# Altium PCB driver_l4_2023-07-21.pcbdoc (part 2 of 2)
Units mil, origin at the board's own origin, x right, y up, seen from the top; angles counter-clockwise.
Board outline 2980 x 3085.67 mil, 2 copper layers (Top Layer, Bottom Layer); 71 components, 86 nets, 273 pads, 209 vias.
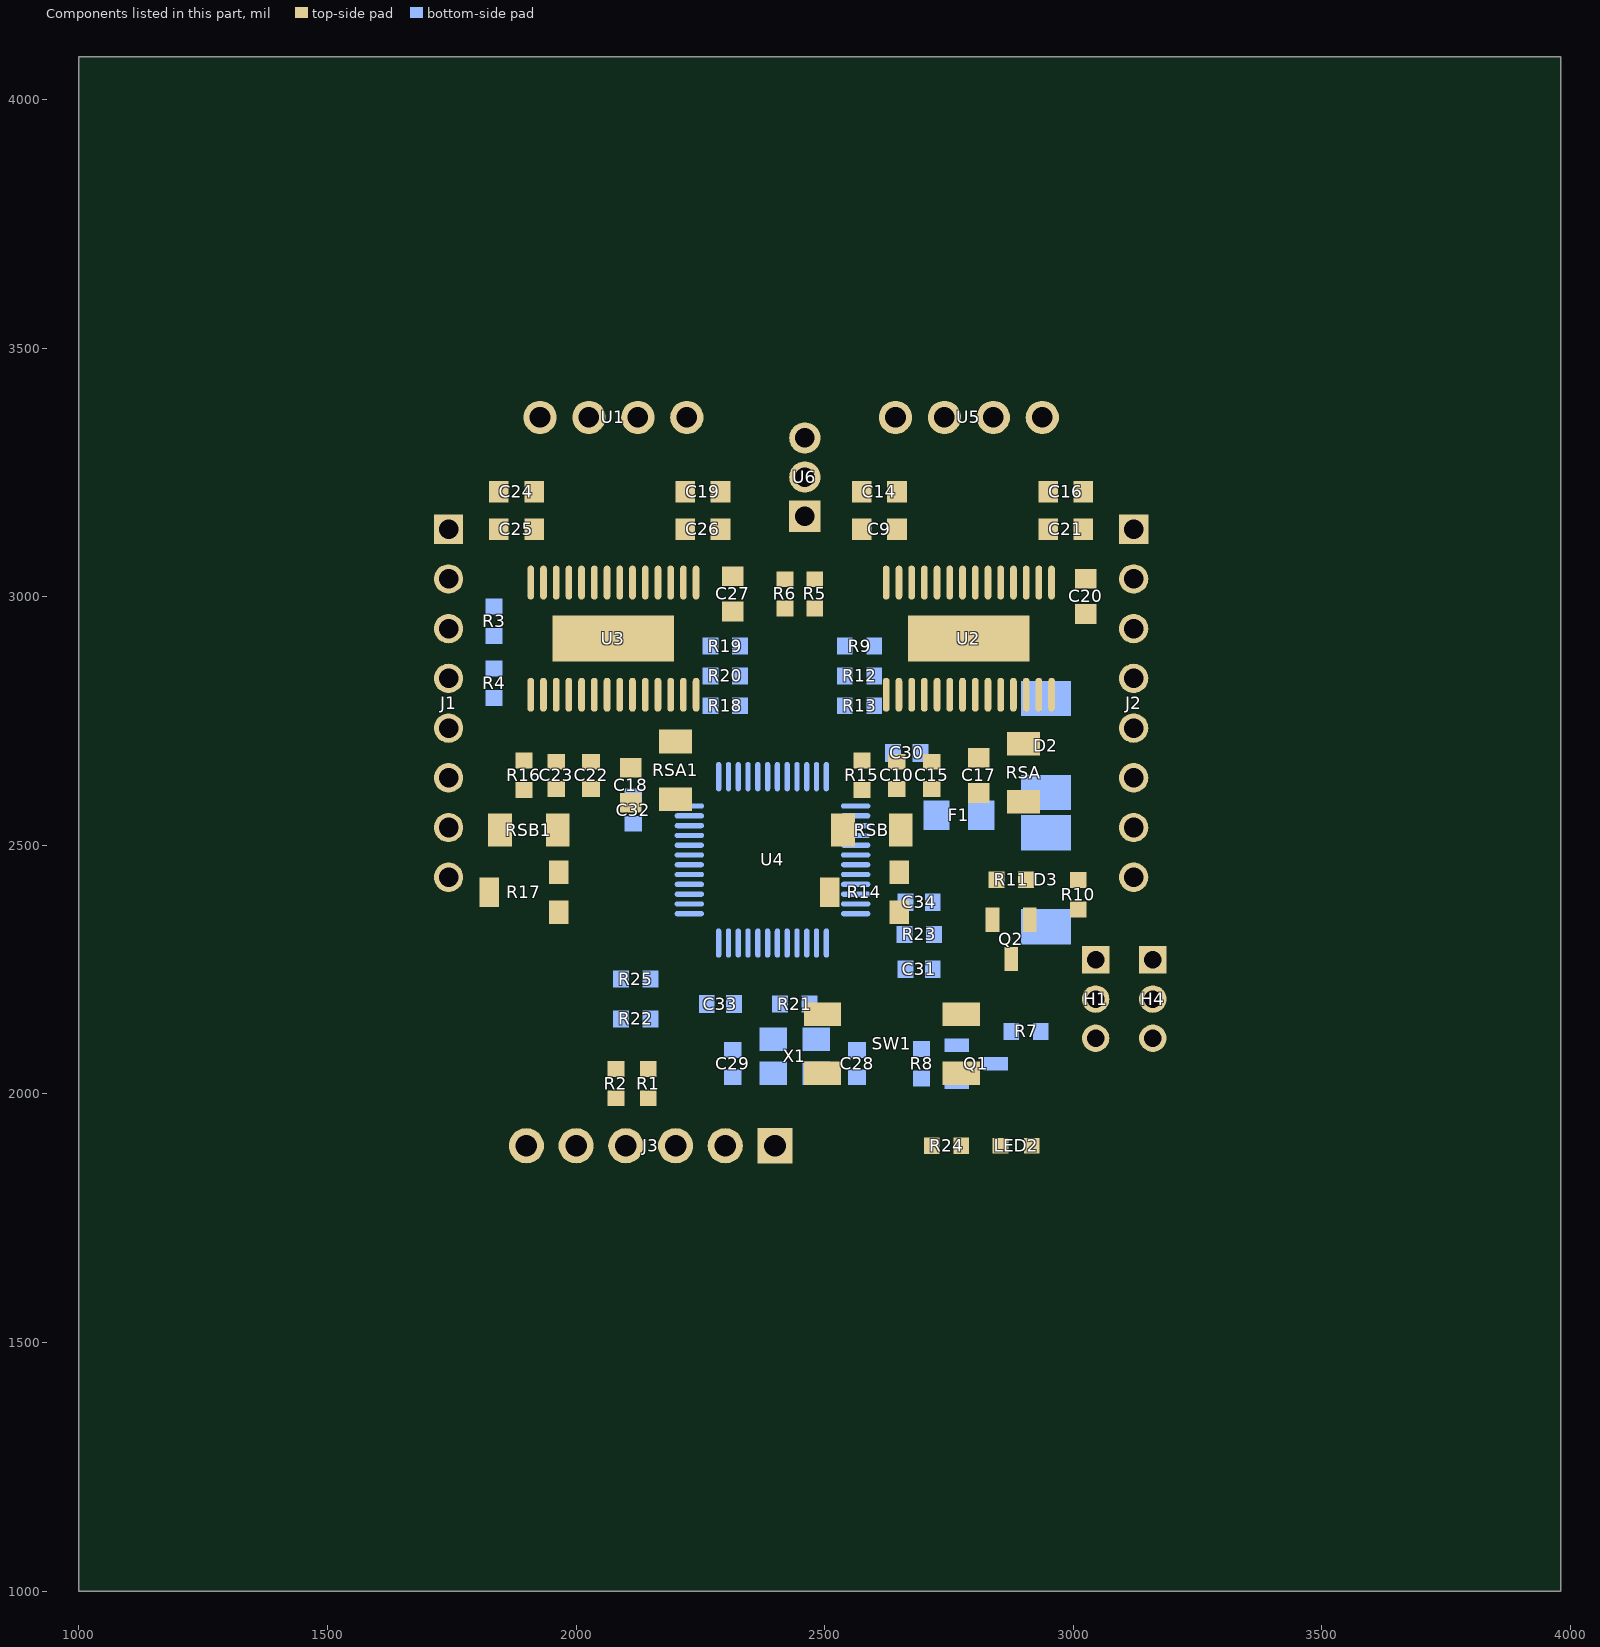
[diagram p2: the components of this part, seen from the top]

## Other copper (continued)
Bottom Layer:
  region net STEP1: 2586.53,2396.46 2586.53,2407.09 2596.1,2406.77 2596.1,2396.77
  region net STEP2: 2538.11,2426.78 2538.11,2416.14 2523.11,2416.47 2523.11,2426.47
  region net PWM_SERVO2: 2586.53,2455.52 2586.53,2466.15 2601.53,2465.83 2601.53,2455.83
  region net PWM_SERVO: 2586.55,2485.82 2586.52,2475.19 2601.52,2475.47 2601.55,2485.47
  region net STDBY1: 2538.11,2514.56 2538.11,2525.19 2523.11,2524.88 2523.11,2514.88
  region net CHRG1: 2538.11,2534.25 2538.11,2544.88 2523.11,2544.57 2523.11,2534.57
  region net R3_CTRL: 2469.22,2662.2 2458.59,2662.2 2458.9,2677.2 2468.9,2677.2
  region net R2_CTRL: 2449.52,2662.2 2438.89,2662.2 2439.21,2677.2 2449.21,2677.2
  region net R1_CTRL: 2429.85,2662.22 2419.22,2662.18 2419.5,2671.15 2429.5,2671.19
  region net RX_DLD: 2410.15,2613.83 2399.52,2613.72 2400,2598.72 2410,2598.83
  region net TX_DLD: 2390.48,2613.78 2379.85,2613.78 2380.16,2598.78 2390.16,2598.78
  region net DIR1: 2351.11,2662.2 2340.48,2662.2 2340.79,2677.2 2350.79,2677.2
  region net DIR2: 2331.42,2662.2 2320.79,2662.2 2321.1,2677.2 2331.1,2677.2
  region net EN1: 2311.74,2613.77 2301.11,2613.78 2301.4,2599.28 2311.4,2599.26
  region net EN2: 2292.05,2662.23 2281.42,2662.18 2281.7,2668.95 2291.7,2668.99
  region net BOOT1: 2251.91,2505.51 2251.87,2494.88 2260.48,2495.17 2260.52,2505.17
  region net CHRG_SAMPLE: 2203.47,2416.14 2203.47,2426.78 2188.47,2426.46 2188.47,2416.46
  region net BAT_SAMPLE: 2203.47,2396.46 2203.47,2407.09 2188.47,2406.77 2188.47,2396.77
  region net RX_LINUX: 2251.89,2357.09 2251.89,2367.72 2266.89,2367.4 2266.89,2357.4
  region net TX_LINUX: 2292.05,2327.56 2281.42,2327.56 2281.73,2342.4 2291.73,2342.4
  region net NRST: 2390.48,2279.08 2379.85,2279.19 2380,2264.19 2390,2264.08
  region net U4_6: 2410.15,2279.14 2399.52,2279.14 2399.84,2264.14 2409.84,2264.14
  region net U4_5: 2429.85,2279.12 2419.22,2279.15 2419.5,2266.18 2429.5,2266.16
  region net BAT_SAMPLE: 1731.46,3106.22 1713.9,3124.01 1708.59,3108.03 1715.62,3100.92
  region net H1_1: 3017.44,2256.87 3017.44,2281.87 3002.44,2274.37 3002.44,2264.37
  region net R20_1: 2254.47,2825.13 2254.47,2855.15 2245,2839.16 2249.25,2826.42
  region net GND: 2345.53,2823.66 2345.53,2857.68 2355,2850.67 2355,2830.67
  region net R19_1: 2254.47,2885.66 2254.47,2915.68 2236.46,2906.67 2236.46,2894.66
  region net GND: 2345.53,2883.66 2345.53,2917.68 2355,2910.67 2355,2890.67
  region net R18_1: 2254.47,2765.66 2254.47,2795.68 2236.46,2786.67 2236.46,2774.66
  region net GND: 2345.53,2763.66 2345.53,2797.68 2355,2790.67 2355,2770.67
  region net U2_17: 2615.53,2795.68 2615.53,2765.66 2622.18,2774.66 2622.18,2786.67
  region net GND: 2524.47,2797.68 2524.47,2763.66 2515,2770.67 2515,2790.67
  region net U2_19: 2615.53,2857.68 2615.53,2830.66 2633.54,2839.66 2633.54,2851.67
  region net GND: 2524.47,2857.68 2524.47,2823.66 2515,2830.67 2515,2850.67
  region net U2_24: 2615.53,2915.68 2615.53,2885.66 2633.54,2894.66 2633.54,2906.67
  region net GND: 2524.47,2917.68 2524.47,2883.66 2515,2890.67 2515,2910.67
  region net GND: 2074.47,2213.66 2074.47,2247.68 2055,2240.67 2055,2220.67
  region net BOOT1: 2165.53,2218.17 2165.53,2243.17 2180.53,2235.67 2180.53,2225.67
  region net VCC3.3: 1852.01,2780.14 1817.99,2780.14 1850.86,2750.67 1872.07,2757.74
  region net CHRG1: 1817.99,2871.2 1817.99,2839.45 1797.74,2848.58 1797.74,2862.08
  region net CHRG1: 1852.01,2843.04 1852.01,2868.04 1864.95,2860.67 1865,2850.67
  region net VCC3.3: 1817.99,2996.2 1852.01,2996.2 1857.07,3003.6 1835.86,3010.67
  region net STDBY1: 1817.99,2936.89 1817.99,2905.14 1797.74,2914.26 1797.74,2927.76
  region net STDBY1: 1852.01,2908.17 1852.01,2933.17 1867.01,2925.67 1867.01,2915.67
  region net GND: 2698.74,2579.41 2698.74,2553.59 2695,2564.81 2698.74,2579.41
  region net GND: 2702.07,2543.6 2698.74,2531.14 2698.74,2553.59 2702.07,2543.6
  region net GND: 2750.02,2590.2 2700.02,2590.2 2715.02,2590.69 2735.02,2590.69
  region net GND: 2729.14,2525.67 2712.73,2531.14 2698.74,2531.14 2707.93,2532.74 2712.73,2531.14 2745.47,2531.14 2729.14,2525.67
  region net GND: 2510.86,2086.5 2510.86,2133.75 2524.84,2123.17 2525,2098.17
  region net GND: 2509.55,2093.09 2510.86,2133.75 2515.44,2109.37 2509.55,2093.09
  region net GND: 2509.34,2086.5 2507.93,2088.6 2509.55,2093.09 2509.34,2086.5
  region net U4_6: 2409.19,2133.75 2384.19,2133.75 2391.69,2137.36 2401.69,2137.36
  region net U4_6: 2369.13,2122.67 2369.13,2097.67 2354.13,2105.17 2354.13,2115.17
  region net GND: 2369.13,2064.85 2369.13,2017.6 2365.55,2028.72 2365.55,2053.72
  region net U4_5: 2455.75,2064.85 2455.75,2042.42 2440.75,2062.85 2440.75,2076.99
  region net U4_5: 2510.86,2020.61 2510.86,2045.61 2525.86,2038.11 2525.86,2028.11
  region net NRST: 2732.16,2303.66 2707.16,2303.66 2714.66,2288.66 2724.66,2288.66
  region net VCC3.3: 2676.22,2337.68 2644.47,2337.68 2647.84,2375.18 2672.84,2375.18
  region net VCC3.3: 2676.22,2303.66 2676.22,2337.68 2680,2330.67 2680,2310.67
  region net VCC3.3: 2644.47,2337.68 2644.47,2303.66 2640,2310.67 2640,2330.67
  region net GND: 2074.47,2133.66 2074.47,2167.68 2055,2160.67 2055,2140.67
  region net BOOT0: 2165.53,2138.17 2165.53,2163.17 2180.53,2155.67 2180.53,2145.67
  region net U4_5: 2457.2,2197.68 2482.2,2197.68 2474.7,2212.68 2464.7,2212.68
  region net U4_5: 2472.5,2163.66 2453.78,2163.66 2455,2160.67 2465,2160.67
  region net U4_6: 2422.84,2197.68 2397.84,2197.68 2405.34,2212.68 2415.34,2212.68
  region net U4_6: 2394.47,2163.66 2417.5,2163.66 2410,2148.66 2400,2148.66
  region net VCC3.3: 2712.01,2046.89 2712.01,2015.14 2719.83,2018.17 2720,2043.17
  region net VCC3.3: 2712.01,2015.14 2677.99,2028.14 2676.16,2019.51 2697.79,2005.78
  region net PWM_SERVO2: 2707.5,2106.2 2682.5,2106.2 2690,2110.67 2700,2110.67
  region net PWM_SERVO2: 2712.01,2085.57 2712.01,2106.2 2727.01,2103.07 2727.01,2093.07
  region net PWM_SERVO2: 2712.01,2106.2 2677.99,2106.2 2685,2110.67 2705,2110.67
  region net VCC5: 2945.35,2142.68 2950.53,2108.66 2956.87,2123.4 2947.93,2142.74
  region net H1_1: 2887.8,2142.68 2862.8,2142.68 2870.3,2145.97 2880.3,2145.97
  region net H1_1: 2862.84,2108.66 2887.84,2108.66 2880.34,2106.01 2870.34,2106.01
  region net H1_1: 2868.97,2074.45 2863.54,2072.76 2858.48,2074.45 2845.65,2074.45 2852.93,2076.3 2858.48,2074.45 2868.97,2074.45
  region net PWM_SERVO2: 2741.03,2110.57 2741.03,2085.57 2726.03,2093.07 2726.03,2103.07
  region net VCC3.3: 2741.03,2037.05 2741.03,2009.49 2727.4,2010.77 2727.4,2035.77
  region net VCC3.3: 2772.68,2000.67 2746.22,2009.49 2790.23,2009.49 2772.68,2000.67
  region net GND: 2732.57,2403.39 2702.55,2403.39 2711.55,2408.11 2723.56,2408.11
  region net GND: 2701.81,2403.39 2701.81,2378.86 2692.93,2387.74 2701.81,2403.39
  region net GND: 2707.07,2373.6 2701.81,2367.95 2701.81,2378.86 2707.07,2373.6
  region net VCC3.3: 2646.69,2400.68 2646.69,2370.66 2643.27,2379.66 2643.27,2391.67
  region net VCC3.3: 2646.69,2367.95 2678.19,2367.95 2672.84,2330.45 2647.84,2330.45
  region net GND: 2332.61,2198.39 2302.59,2198.39 2311.6,2208.27 2323.6,2208.27
  region net GND: 2301.81,2162.95 2333.31,2162.95 2327.56,2158.11 2307.56,2158.11
  region net VCC3.3: 2248.85,2198.39 2278.19,2192.04 2290.61,2207.78 2276.64,2210.8
  region net VCC3.3: 2246.69,2162.95 2278.19,2162.95 2274.94,2158.11 2249.94,2158.11
  region net GND: 2132.72,2528.1 2132.72,2558.12 2150.73,2549.11 2150.73,2537.1
  region net VCC3.3: 2132.72,2583.22 2132.72,2613.24 2150.73,2604.23 2150.73,2592.23
  region net VCC3.3: 2132.72,2613.98 2097.28,2613.98 2105,2630.67 2125,2630.67
  region net GND: 2646.69,2268.39 2646.69,2232.95 2645,2240.67 2645,2260.67
  region net NRST: 2729.78,2268.39 2711.46,2267.13 2712.72,2268.39 2704.78,2268.39 2718.54,2274.2 2712.72,2268.39 2729.78,2268.39
  region net NRST: 2712.72,2268.39 2722.07,2277.74 2733.31,2268.39 2712.72,2268.39
  region net NRST: 2712.72,2268.39 2707.93,2263.6 2701.81,2268.39 2712.72,2268.39
  region net GND: 2676.81,2667.95 2705.01,2667.95 2696,2660.67 2684,2660.67
  region net GND: 2707.57,2703.39 2677.55,2703.39 2686.55,2708.11 2698.56,2708.11
  region net VCC3.3: 2621.69,2700.68 2621.69,2670.66 2603.68,2679.66 2603.68,2691.67
  region net VCC3.3: 2651.83,2667.95 2621.69,2703.39 2609.29,2671.66 2622.29,2656.38
  region net U4_6: 2332.72,2083.17 2332.72,2103.98 2335,2100.67 2335,2090.67
  region net GND: 2332.72,2017.36 2332.72,2048.86 2355,2043.17 2355,2018.17
  region net U4_5: 2547.29,2045.61 2547.29,2020.61 2532.29,2028.11 2532.29,2038.11
  region net GND: 2582.71,2072.48 2582.71,2103.98 2587.56,2098.23 2587.56,2078.23
  region net GND: 2659.14,2629.03 2659.14,2642.31 2652.94,2641.67 2652.94,2629.66
  region net GND: 2673.84,2635.11 2664.45,2644.51 2669.28,2648.44 2677.77,2639.95
  region net GND: 2650.86,2629.03 2650.86,2642.31 2657.06,2641.67 2657.06,2629.66
  region net GND: 2148.73,2552.17 2140.4,2541.82 2144.56,2537.1 2154.23,2549.11
  region net GND: 2139.6,2541.82 2131.27,2552.17 2125.77,2549.11 2135.44,2537.1
  region net STDBY1: 2338.84,2510.11 2329.45,2519.51 2334.99,2522.73 2342.06,2515.66
  region net CHRG1: 2327.69,2531.28 2323.4,2543.85 2329.7,2544.57 2333.12,2534.57
  region net RX_DLD: 2411.64,2586.53 2398.36,2586.53 2400,2592.73 2410,2592.73
  region net TX_DLD: 2388.51,2593.12 2376.5,2598.81 2380.16,2603.94 2390.16,2599.2
  region net CHRG1: 2034.14,2514.03 2034.14,2527.31 2027.94,2525.67 2027.94,2515.67
  region net STDBY1: 2015.55,2559.51 2006.16,2550.11 2002.94,2555.66 2010.01,2562.73
  region net R1_CTRL: 2089.14,2439.03 2089.14,2452.31 2082.94,2450.67 2082.94,2440.67
  region net R2_CTRL: 2099.14,2464.03 2099.14,2477.31 2092.94,2475.67 2092.94,2465.67
  region net R3_CTRL: 2109.14,2489.03 2109.14,2502.31 2102.94,2500.67 2102.94,2490.67
  region net EN2: 2095.86,2719.03 2095.86,2732.31 2102.06,2730.67 2102.06,2720.67
  region net EN1: 2778.12,2742.38 2766.39,2748.61 2764.73,2742.47 2773.97,2737.56
  region net DIR2: 2048.09,2759.29 2042.58,2747.19 2048.7,2745.67 2053.25,2755.67
  region net DIR1: 2750.55,2746.83 2741.16,2756.22 2737.94,2750.68 2745.01,2743.61
  region net BOOT1: 2189.14,2224.03 2189.14,2237.31 2182.94,2235.67 2182.94,2225.67
  region net BOOT1: 2386.64,2376.53 2373.36,2376.53 2375,2380.67 2385,2380.67
  region net R3_CTRL: 2405.86,2734.03 2405.86,2747.31 2412.06,2745.67 2412.06,2735.67
  region net R2_CTRL: 2405.86,2709.03 2405.86,2722.31 2410,2720.67 2410,2710.67
  region net R1_CTRL: 2408.29,2693.79 2402.06,2682.05 2408.2,2680.4 2413.1,2689.64
  region net BOOT0: 2189.14,2144.03 2189.14,2157.31 2182.94,2155.67 2182.94,2145.67
  region net BOOT0: 2470.86,2434.03 2470.86,2447.31 2477.06,2445.67 2477.06,2435.67
  region net NRST: 2723.39,2273.51 2711.14,2278.64 2714.66,2283.89 2724.66,2279.7
  region net NRST: 2722.74,2266.35 2709.75,2263.53 2712.56,2257.8 2722.56,2259.97
  region net NRST: 2391.64,2241.53 2378.36,2241.53 2380,2247.73 2390,2247.73
  region net TX_LINUX: 2324.14,2359.03 2324.14,2372.31 2317.94,2370.67 2317.94,2360.67
  region net RX_LINUX: 2314.14,2384.03 2314.14,2397.31 2307.94,2395.67 2307.94,2385.67
  region net STEP2: 2138.84,2701.22 2129.45,2691.83 2134.99,2688.61 2142.06,2695.68
  region net STEP1: 2811.64,2754.81 2798.36,2754.81 2800,2748.61 2810,2748.61
  region net PWM_SERVO2: 2701.64,2104.81 2688.36,2104.81 2690,2098.61 2700,2098.61
  region net PWM_SERVO2: 2694.14,2459.03 2694.14,2472.31 2687.94,2470.67 2687.94,2460.67
  region net PWM_SERVO: 2694.14,2484.03 2694.14,2497.31 2687.94,2495.67 2687.94,2485.67
  region net U2_17: 2674.14,2749.03 2674.14,2762.31 2667.94,2761.67 2667.94,2749.66
  region net U2_24: 2855.55,2854.51 2846.16,2845.11 2842.23,2849.95 2850.72,2858.44
  region net U2_19: 2719.14,2839.03 2719.14,2852.31 2712.94,2851.67 2712.94,2839.66
  region net R18_1: 1970.86,2749.03 1970.86,2762.31 1977.06,2761.67 1977.06,2749.66
  region net R20_1: 2145.86,2839.03 2145.86,2852.31 2152.06,2851.67 2152.06,2839.66
  region net R19_1: 2018.84,2845.11 2009.45,2854.51 2014.28,2858.44 2022.77,2849.95
  region net R1_CTRL: 1767.82,2419.11 1756.89,2462.03 1781.11,2450.67 1783.66,2440.67
  region net R2_CTRL: 1741.58,2506.28 1772.9,2537.6 1775.39,2510.86 1768.32,2503.79
  region net R3_CTRL: 1741.58,2606.28 1772.9,2637.6 1775.39,2610.86 1768.32,2603.79
  region net CHRG1: 1771.27,2825.92 1749.7,2864.6 1774.77,2862.08 1782.3,2848.58
  region net STDBY1: 1769.72,2949.19 1753.48,2907.98 1778.17,2914.26 1783.49,2927.76
  region net CHRG_SAMPLE: 1713.96,3037.62 1745.25,3006.28 1718.51,3003.81 1711.45,3010.89

## Silkscreen, mask and mechanical layers (free items; w line width, h text height)
Top Overlay:
  lines w10 net S$48162: 1670,2065.67 2030,2065.67 2035,2070.67 2035,2260.67 1670,2260.67 1670,2065.67
  text "V12" at 3168.19,3160.67 h23.62 r270
  text "BAT_S" at 1689.84,3105.5 h19.68 r89
  text "CHG_S" at 1689.84,2990.67 h19.68 r90
  text "GND_IN" at 3216.81,2955.67 h23.62 r90
  text "STBY" at 1689.84,2900.67 h19.68 r90
  text "V5" at 3168.19,2855.67 h23.62 r270
  text "CHG" at 1689.84,2810.67 h19.68 r90
  text "R4_C_" at 1679.84,2685.5 h19.68 r89
  text "GND_IN" at 3216.81,2660.67 h23.62 r90
  text "R3_C" at 1689.84,2595.67 h19.68 r90
  text "V3.3" at 3168.19,2580.67 h23.62 r270
  text "R2_C" at 1689.84,2500.67 h19.68 r90
  text "R1_C" at 1689.84,2400.67 h19.68 r90
  text "GND_IN" at 3216.81,2355.67 h23.62 r90
  text "PWM2" at 3085,2352.48 h23.62 r180
  text "PWM1" at 3200,2352.48 h23.62 r180
  text "Balldi Drv  / V3.0" at 1690.45,2160.08 h51.18 r1
  text "VCC5" at 3011.81,2150.67 h23.62 r90
  text "GND" at 2963.19,2130.67 h23.62 r270